# Allegro board RCL_Meter.brd
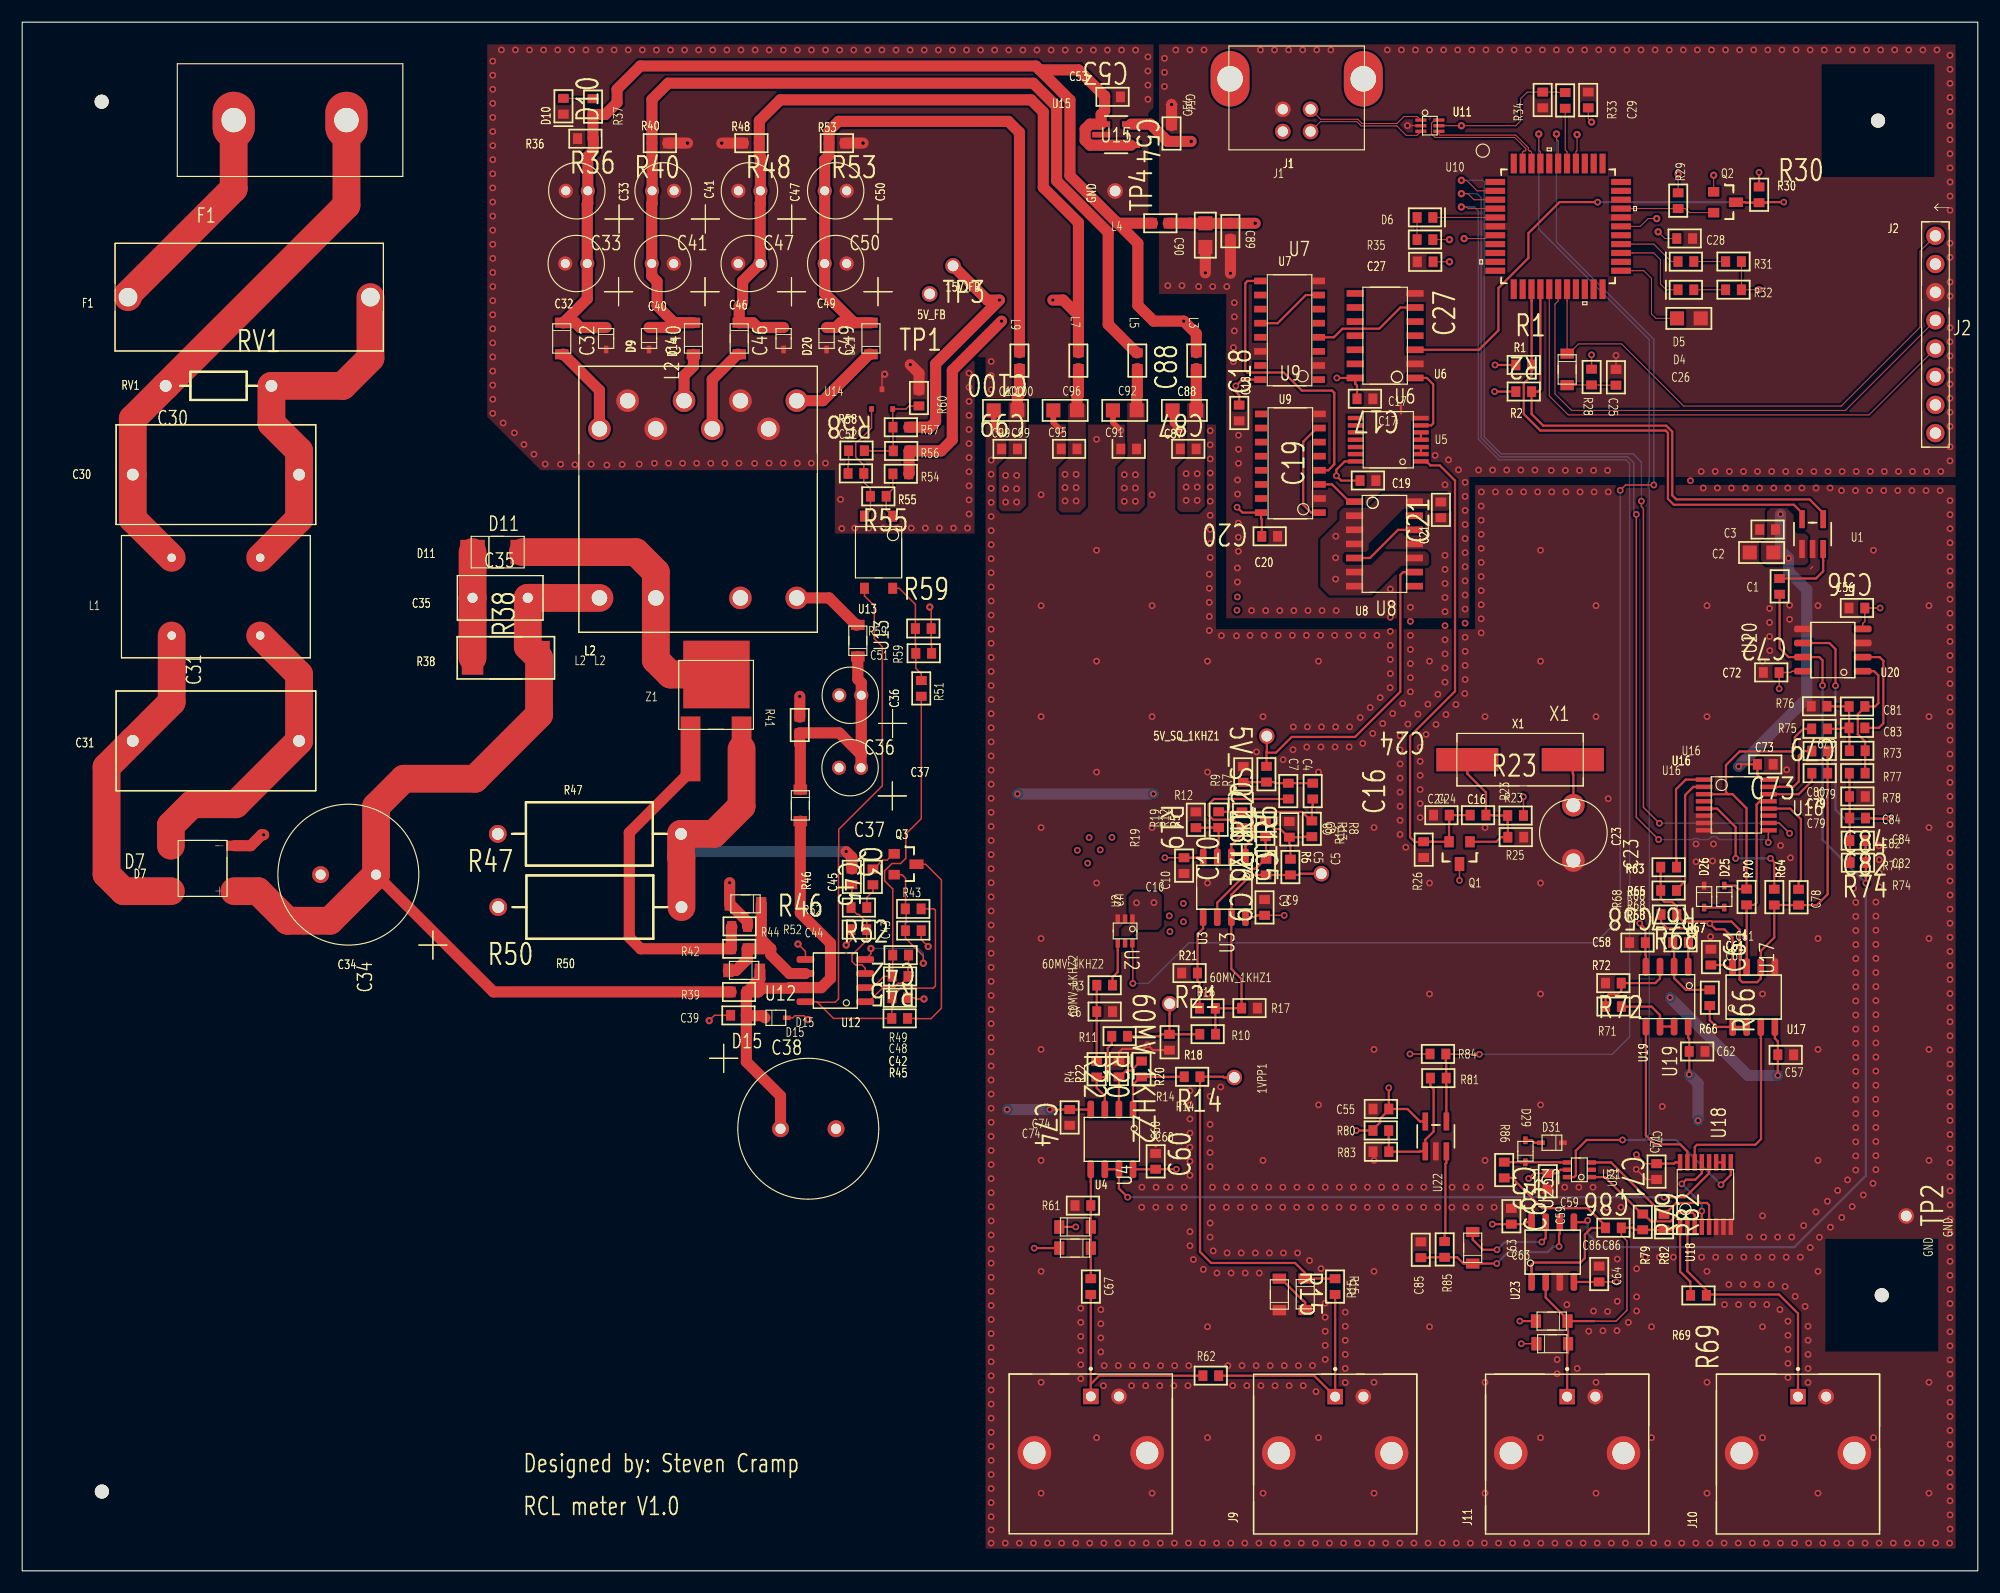
[diagram p0: board, top side]
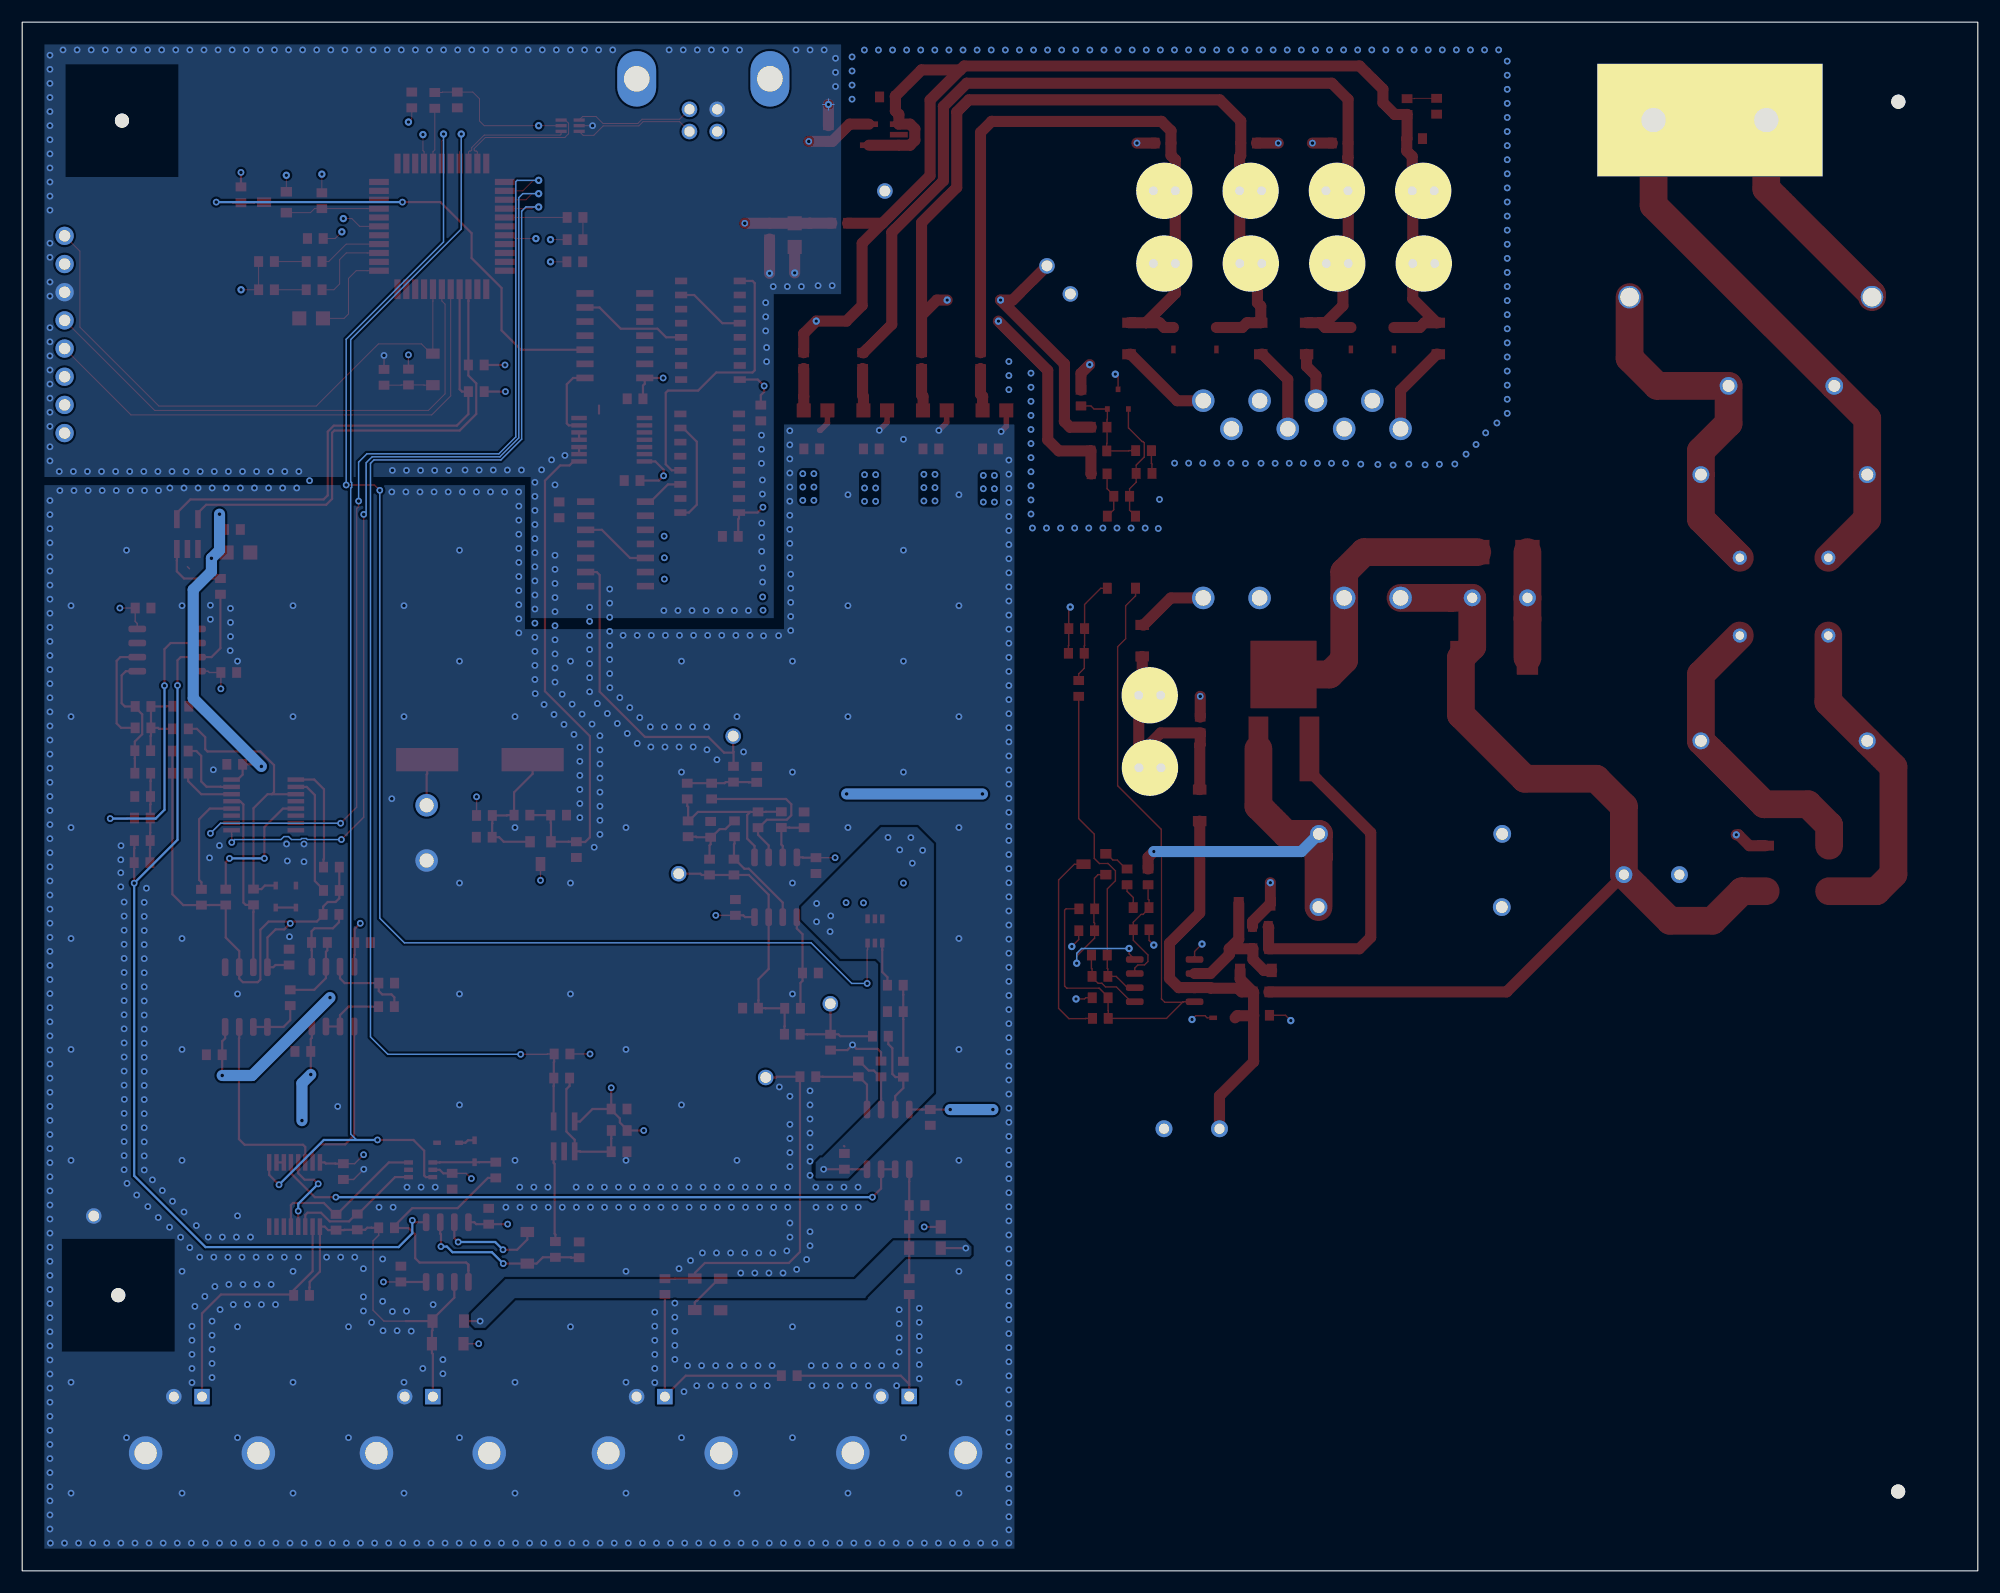
[diagram p1: board, bottom side, seen from below]

Outline 176.2 x 139.6 mm; copper layers: TOP, GND PLANE, POWER PLANE, BOTTOM. Coordinates in mm from the lower left corner of the outline.
Outline path: rectangle 0,0 176.2,139.6

## Design rules (mm)
constraint set DEFAULT: min track width 0.09
net group DP1: nets D+ D-
net group DP2: nets D+ CONN D- CONN
nets with their own width: min track width 0.127; nets N644548
nets with their own width: min track width 1; nets N643724 N643794 N644128 N644562 N644632 N645758 N645784 N658729

## Placement (name value [footprint] x y rotation side)
C1  470n  [SMC0603]  158.34 88.03 90 top
C2  10u  [SMC0805]  155.65 91.79 0 top
C3  0.1u  [SMC0603]  156.55 93.87 0 top
C4  1.5n  [SMC0603]  116.28 71 270 top
C5  1.5n  [SMC0603]  114.27 64.15 270 top
C6  0.1u  [SMC0603]  98.24 50.41 180 top
C7  1.5n  [SMC0603]  114.08 71 270 top
C8  1.5n  [SMC0603]  112.02 67.6 270 top
C9  0.1u  [SMC0603]  111.94 60.51 270 top
C10  0.1u  [SMC0603]  104.68 62.86 90 top
C16  100p  [SMC0603]  130.46 68.12 0 top
C17  0.1u  [SMC0603]  121.69 105.65 180 top
C18  0.1u  [SMC0603]  109.65 103.66 90 top
C19  0.1u  [SMC0603]  121.96 98.28 180 top
C20  0.1u  [SMC0603]  113.11 93.25 180 top
C21  0.1u  [SMC0603]  127.82 94.93 90 top
C23  GKG30015  [GKGXXX15]  139.76 66.52 90 top
C24  100p  [SMC0603]  127.16 68.12 0 top
C25  0.1u  [SMC0603]  143.6 108.3 270 top
C26  10u  [SMC0805]  149.1 112.9 0 top
C27  0.1u  [SMC0603]  125.7 118 0 top
C28  0.1u  [SMC0603]  150.5 120.1 180 top
C29  0.1u  [SMC0603]  141.1 133.3 270 top
C30  0.47u  [B32922C3]  17.45 98.81 0 top
C31  0.47u  [B32922C3]  17.45 74.81 0 top
C32  47u  [CAPBULK_CIR5_PITCH2]  49.92 117.84 180 top
C33  47u  [CAPBULK_CIR5_PITCH2]  49.97 124.4 180 top
C34  100u  [CAPBULK_CIR125_PITCH5]  29.39 62.75 180 top
C35  1u  [LEADED_MLCC_UB1]  43.06 87.71 0 top
C36  1u  [CAPBULK_CIR5_PITCH2]  74.61 78.93 180 top
C37  1u  [CAPBULK_CIR5_PITCH2]  74.59 72.4 180 top
C38  100u  [CAPBULK_CIR125_PITCH5]  70.83 39.85 0 top
C39  0.1u  [SMC0603]  63.83 50.07 0 top
C40  47u  [CAPBULK_CIR5_PITCH2]  57.71 117.84 180 top
C41  47u  [CAPBULK_CIR5_PITCH2]  57.74 124.4 180 top
C42  0.1u  [SMC0603]  79.79 51.66 180 top
C43  10n  [SMC0603]  81 57.71 180 top
C44  68p  [SMC0603]  76.09 57.79 180 top
C45  100p  [SMC0603]  76.65 63.26 270 top
C46  33u  [CAPBULK_CIR5_PITCH2]  65.5 117.84 180 top
C47  33u  [CAPBULK_CIR5_PITCH2]  65.52 124.4 180 top
C48  10n  [SMC0603]  78.39 53.59 0 top
C49  33u  [CAPBULK_CIR5_PITCH2]  73.3 117.84 180 top
C50  33u  [CAPBULK_CIR5_PITCH2]  73.3 124.4 180 top
C51  1.5n  [SMC0603]  81.94 82.71 180 top
C52  10n  [SMC0603]  75.83 98.92 180 top
C53  1u  [SMC0603]  98.95 132.87 180 top
C54  2.2u  [SMC0603]  103.56 130.28 270 top
C55  0.1u  [SMC0603]  123.13 41.63 180 top
C56  0.1u  [SMC0603]  166.02 86.79 180 top
C57  0.1u  [SMC0603]  158.18 46.52 0 top
C58  0.1u  [SMC0603]  146.25 56.63 180 top
C59  0.1u  [SMC0603]  137.46 35.83 270 top
C60  0.1u  [SMC0603]  102.12 36.2 90 top
C61  0.1u  [SMC0603]  152.15 54.61 90 top
C62  0.1u  [SMC0603]  150.2 46.82 0 top
C63  0.1u  [SMC0603]  134.17 31.25 90 top
C64  0.1u  [SMC0603]  142.08 26.04 90 top
C67  1u  [SMC0603]  96.28 24.91 90 top
C71  0.1u  [SMC0603]  147.26 36.7 270 top
C72  0.1u  [SMC0603]  158.3 80.98 180 top
C73  0.1u  [SMC0603]  156.34 72.7 0 top
C74  0.1u  [SMC0603]  94.38 41.58 270 top
C78  2.4n  [SMC0603]  160.05 60.01 90 top
C79  240p  [SMC0603]  162.67 71.9 180 top
C80  24p  [SMC0603]  162.67 73.9 180 top
C81  10n  [SMC0603]  164.6 77.92 0 top
C82  10n  [SMC0603]  164.67 65.83 0 top
C83  10n  [SMC0603]  164.6 75.99 0 top
C84  10n  [SMC0603]  164.66 67.86 0 top
C85  1u  [SMC0603]  126.02 29.65 270 top
C86  50p  [SMC0603]  144.08 30.92 180 top
C87  0.1u  [SMC0603]  105.77 101.13 180 top
C88  10u  [SMC0805]  105.78 104.61 180 top
C89  0.1u  [SMC0603]  108.86 121.47 270 top
C90  10u  [SMC0805]  106.6 121.47 270 top
C91  0.1u  [SMC0603]  100.4 101.13 180 top
C92  10u  [SMC0805]  100.41 104.61 180 top
C95  0.1u  [SMC0603]  95.04 101.13 180 top
C96  10u  [SMC0805]  95.04 104.61 180 top
C99  0.1u  [SMC0603]  89.67 101.13 180 top
C100  10u  [SMC0805]  89.66 104.61 180 top
D1  MMSZ4679-TP  [SOD_123]  115.6 24.93 90 top
D2  MMSZ4679-TP  [SOD_123]  113.27 24.91 270 top
D3  PMEG3010EH,115  [SOD_123]  139.2 108.3 90 top
D4  RED  [DSMC0603]  149.19 115.48 0 top
D5  RED  [DSMC0603]  149.19 118.02 0 top
D6  RED  [DSMC0603]  127.1 122 180 top
D7  ABF26TR  [SOPA-4]  16.26 63.31 180 top
D8  PMEG3010EH,115  [SOD_123]  48.61 111.09 90 top
D9  DDZ5V1BSF-7  [SOD323]  52.61 111.09 90 top
D10  RED  [DSMC0603]  48.76 131.31 90 top
D11  S1MTR  [SMA]  42.84 91.83 0 top
D12  PMEG3010EH,115  [SOD_123]  75.29 83.84 270 top
D13  PMEG3010EH,115  [SOD_123]  70.11 69 90 top
D14  DDZ5V1BSF-7  [SOD323]  56.48 111.09 270 top
D15  DDZ20BSF-7  [SOD323]  67.91 49.85 180 top
D16  PMEG3010EH,115  [SOD_123]  65.05 54.12 0 top
D17  PMEG3010EH,115  [SOD_123]  60.48 111.09 270 top
D18  PMEG3010EH,115  [SOD_123]  65.17 60.12 0 top
D19  PMEG3010EH,115  [SOD_123]  64.6 111.09 90 top
D20  DDZ16ASF-7  [SOD323]  68.6 111.09 90 top
D21  DDZ16ASF-7  [SOD323]  72.47 111.09 270 top
D22  PMEG3010EH,115  [SOD_123]  76.47 111.09 270 top
D23  PMEG3010EH,115  [SOD_123]  94.86 31 180 top
D24  PMEG3010EH,115  [SOD_123]  94.86 29.09 0 top
D25  DDZ5V1BSF-7  [SOD323]  153.36 60.78 90 top
D26  DDZ5V1BSF-7  [SOD323]  151.54 60.78 90 top
D27  PMEG3010EH,115  [SOD_123]  137.86 20.47 180 top
D28  PMEG3010EH,115  [SOD_123]  130.69 29.12 270 top
D29  DDZ5V1BSF-7  [SOD323]  135.44 37.82 270 top
D30  PMEG3010EH,115  [SOD_123]  137.81 22.51 0 top
D31  DDZ5V1BSF-7  [SOD323]  137.83 38.59 0 top
F1  4527  [4527_FUSE_HOLDER]  20.45 114.81 0 top
J2  CON8  [HEADER8_PIN]  172.38 111.45 0 top
J8  1-1337543-0  [CONN_1-1337543-0]  96.28 15.72 90 top
J9  1-1337543-0  [CONN_1-1337543-0]  118.3 15.7 90 top
J10  1-1337543-0  [CONN_1-1337543-0]  160 15.7 90 top
J11  1-1337543-0  [CONN_1-1337543-0]  139.2 15.7 90 top
J12  CON2  [MAINS]  24.14 130.78 180 top
J13  CON6  [USB_B]  114.83 130.69 180 top
L1  TLF9UA102W0R8K1  [TLF9UA]  17.45 87.81 270 top
L2  Custome transformer _0  [B66206]  60.9 96.59 90 top
L3  ILBB-0603  [SMC0603]  105.79 109.81 270 top
L4  ILBB-0603  [SMC0603]  101.83 121.48 0 top
L5  ILBB-0603  [SMC0603]  100.48 109.81 270 top
L7  ILBB-0603  [SMC0603]  95.17 109.81 270 top
L9  ILBB-0603  [SMC0603]  89.86 109.81 270 top
NOREF  -  [unnamed]  167.21 130.73 0 top
NOREF#2  -  [unnamed]  167.55 24.84 0 top
NOREF#3  -  [unnamed]  7.18 7.15 0 top
NOREF#4  -  [unnamed]  7.16 132.43 0 top
Q1  MMBT3904  [SMSOT23123]  128.56 65.72 180 top
Q2  BSS138  [SMSOT23123]  152.4 122.43 270 top
Q3  MMBT3904  [SMSOT23123]  78.57 62.75 270 top
R1  2k  [SMC0603]  136 108.7 180 top
R2  2k  [SMC0603]  136 106.3 180 top
R3  1k  [SMC0603]  96.82 52.79 0 top
R4  1k  [SMC0603]  96.81 45.93 270 top
R5  1M  [SMC0603]  109.9 66.99 90 top
R6  1M  [SMC0603]  112.07 64.15 270 top
R7  2M  [SMC0603]  112.11 72.52 270 top
R8  2M  [SMC0603]  116.2 67.6 270 top
R9  10k  [SMC0603]  110.02 72.5 270 top
R10  1k  [SMC0603]  107.52 48.37 180 top
R11  51R  [SMC0603]  99.59 48.19 180 top
R12  100k  [SMC0603]  107.8 67 90 top
R13  10k  [SMC0603]  114.17 67.55 270 top
R14  100R  [SMC0603]  104.7 44.54 0 top
R15  330R  [SMC0603]  118.29 26.33 270 top
R16  1M  [SMC0603]  106.08 50.71 0 top
R17  51R  [SMC0603]  111.29 50.72 180 top
R18  51R  [SMC0603]  103.37 46.94 90 top
R19  1.5k  [SMC0603]  105.75 68.41 270 top
R20  82k  [SMC0603]  100.86 45.95 270 top
R21  1.5k  [SMC0603]  104.47 53.89 0 top
R22  10k  [SMC0603]  98.82 45.95 270 top
R23  100k  [SMC0603]  133.84 68.09 0 top
R25  24k  [SMC0603]  135.28 66.13 180 top
R26  2k  [SMC0603]  126.27 64.3 90 top
R28  10k  [SMC0603]  141.4 106.9 90 top
R29  10k  [SMC0603]  149.2 122.8 90 top
R30  10k  [SMC0603]  156.49 123.33 90 top
R31  330R  [SMC0603]  154.9 118.02 180 top
R32  330R  [SMC0603]  154.9 115.48 180 top
R33  100k  [SMC0603]  139.02 133.26 270 top
R34  100k  [SMC0603]  137 133.3 270 top
R35  330R  [SMC0603]  127.1 120 180 top
R36  NP  [SMC0603]  50.04 129.1 0 top
R37  330R  [SMC0603]  51.42 131.28 90 top
R38  680k  [SMR2512]  46.57 82.3 180 top
R39  100k  [SMC0603]  63.88 52.19 0 top
R40  NP  [SMC0603]  56.74 128.7 0 top
R41  1k  [SMC0603]  70.06 76.96 270 top
R42  100R  [SMC0603]  63.89 56.07 0 top
R43  1k  [SMC0603]  79.57 59.68 0 top
R44  100k  [SMC0603]  65.35 58.09 180 top
R45  10k  [SMC0603]  79.77 49.79 180 top
R46  24k  [SMC0603]  74.76 63.27 270 top
R47  3R  [AX650X225037]  42.85 66.43 0 top
R48  NP  [SMC0603]  64.99 128.7 0 top
R49  10k  [SMC0603]  78.44 55.5 0 top
R50  3R  [AX650X225037]  42.89 59.83 0 top
R51  10k  [SMC0603]  81.01 80.25 270 top
R52  49.9k  [SMC0603]  74.67 59.79 0 top
R53  NP  [SMC0603]  72.7 128.7 0 top
R54  51R  [SMC0603]  79.88 98.88 180 top
R55  1.2k  [SMC0603]  76.42 96.87 0 top
R56  5.1k  [SMC0603]  78.48 100.96 0 top
R57  24k  [SMC0603]  78.46 103.09 0 top
R58  82k  [SMC0603]  75.88 100.98 180 top
R59  150R  [SMC0603]  81.9 84.94 180 top
R60  2.7k  [SMC0603]  80.8 106.43 270 top
R61  10M  [SMC0603]  94.86 32.93 0 top
R62  100R  [SMC0603]  107.8 17.59 180 top
R63  100R  [SMC0603]  147.63 63.43 0 top
R64  1k  [SMC0603]  157.86 60.02 90 top
R65  10k  [SMC0603]  147.63 61.33 0 top
R66  10k  [SMC0603]  152.05 50.95 90 top
R67  10k  [SMC0603]  150.13 56.64 180 top
R68  1k  [SMC0603]  147.66 59.17 0 top
R69  1k  [SMC0603]  150.32 24.83 0 top
R70  100R  [SMC0603]  155.36 60.03 90 top
R71  10k  [SMC0603]  144.09 50.86 180 top
R72  10k  [SMC0603]  142.65 52.98 0 top
R73  2.7M  [SMC0603]  164.63 73.93 0 top
R74  2.7M  [SMC0603]  164.69 63.84 0 top
R75  1.2M  [SMC0603]  161.23 75.9 0 top
R76  100R  [SMC0603]  161.19 77.94 0 top
R77  750k  [SMC0603]  166.05 71.9 180 top
R78  100R  [SMC0603]  166.06 69.8 180 top
R79  3.3k  [SMC0603]  146.01 30.74 90 top
R80  10k  [SMC0603]  123.12 39.69 180 top
R81  240k  [SMC0603]  126.88 44.42 0 top
R82  330R  [SMC0603]  147.92 30.71 90 top
R83  10k  [SMC0603]  121.71 37.78 0 top
R84  10k  [SMC0603]  128.27 46.59 180 top
R85  10k  [SMC0603]  128.16 28.26 90 top
R86  330R  [SMC0603]  133.53 36.84 270 top
RV1  MOV-07D201K  [AX375X100034]  22.45 106.81 180 top
TP1  5V  [TP]  81.76 115.1 0 top
TP2  -5V  [TP]  169.75 31.99 90 top
TP3  15V  [TP]  83.87 117.63 0 top
TP4  -15V  [TP]  98.47 124.38 90 top
U1  MCP3221A5T-EOT  [SOT-23-5_MC_MCH-M]  161.31 93.46 90 top
U2  74LVC1G3157  [SC70_2]  99.37 57.68 270 top
U3  LM2904/NS  [8-SOIC]  108.31 61.62 270 top
U4  LM2904/NS  [8-SOIC]  98.18 38.89 270 top
U5  74HC05  [14TSSOP]  123.08 101.96 180 top
U6  74HC393  [14-SOIC]  122.8 111.34 180 top
U7  74HC390  [16-SOIC]  114.19 111.83 180 top
U8  74HC73  [14-SOIC]  122.74 92.57 0 top
U9  74HC390  [16-SOIC]  114.26 99.84 180 top
U10  pic18f46j53-ipt  [TQFP44_10X10MC_MCH-M]  138.39 121.19 0 top
U11  USBLC6-2P6  [SOT666]  126.83 130.27 0 top
U12  UC3843  [8-SOIC]  73.27 53.21 180 top
U13  FODM124  [4-SMD_GULLWING]  77.16 91.82 270 top
U14  TL431IDBZR  [SOT23]  77.46 105.62 90 top
U15  adp1714aujz33r7  [SOT-23-5_MC_MCH-M]  98.56 129.46 0 top
U16  74HC4052  [16TSSOP]  154.44 69.04 0 top
U17  LM2904/NS  [8-SOIC]  156.01 51.72 90 top
U18  74HC4053  [16TSSOP]  151.66 33.92 90 top
U19  LM2904/NS  [8-SOIC]  148.2 51.76 270 top
U20  LM2904/NS  [8-SOIC]  163.14 83 180 top
U21  74LVC1G3157  [SC70_2]  140.3 36.15 180 top
U22  lmv331/NS  [SOT-23-5_MC_MCH-M]  127.37 39.16 90 top
U23  LM2904/NS  [8-SOIC]  137.9 28.73 90 top
UNK1VPP1  TEST POINT_1  [TP]  109.21 44.47 0 top
UNK5V_SQ_1KHZ1  TEST POINT_1  [TP]  112.14 75.24 270 top
UNK60MV_1KHZ1  TEST POINT_1  [TP]  117.05 62.84 270 top
UNK60MV_1KHZ2  TEST POINT_1  [TP]  103.39 51.12 270 top
X1  ABLS-16.000MHZ-20-B-3-H-T  [ABLS]  134.96 73.12 180 top
Z1  FGD5T120SH  [TO252AA]  60.22 74.12 0 top

## Library data of the parts
C1-C10 C16-C21 C24-C31 C35 C39 C42-C45 C48 C51-C64 C67 C71-C74 C78-C86 = C
C23 = C_var
C32-C34 C36-C38 C40 C41 C46 C47 C49 C50 = CAP
C87-C92 C95 C96 C99 C100 = CAP NP
D1 D2 = mmsz5221bt1_0
D3 = BAS16_0
D4-D6 D10 = LED
D7 = BRIDGE_2
D8 D12 D16-D19 D22 = 6CWQ10FN_1
D9 D14 D15 D20 D21 D25 D26 D29 D31 = DDZ4V7ASF-7
D11 D13 = 1N1183
D23 D24 D27 D28 D30 = 1N4148_0
F1 = FUSE/SM
J2 = CON8
J8-J11 = 1-1337543-0
J12 = CON2_0
J13 = CON6_0
L1 = B82793C0475N265_0
L2 = Custome transformer _0
L3-L5 L7 L9 = BEAD
Q1 = MMBT3904
Q2 = BSS138
Q3 = 2N3904
R1-R23 R25 R26 R28-R36 R38-R86 = R
R37 = RES_0
RV1 = VARISTOR
TP1-TP4 = T POINT R
U1 = MCP3221A5T-EOT
U2 U21 = 74LVC1G3157
U3 U4 U17 U19 U20 U23 = LM2904/NS
U5 = 74HC05
U6 = 74HC393
U7 U9 = 74HC390
U8 = 74HC73
U10 = pic18f46j53-ipt
U11 = USBLC6-2P6
U12 = UC3843
U13 = 3N243
U14 = TL431_0
U15 = adp1714aujz33r7
U16 = 74HC4052
U18 = 74HC4053_0
U22 = lmv331/NS
UNK1VPP1 UNK5V_SQ_1KHZ1 UNK60MV_1KHZ1 UNK60MV_1KHZ2 = TEST POINT_1
X1 = QZS10MEG
Z1 = ZbreakN

## Footprints (pads in the part's own frame, mm; a bottom-side part is the same pattern mirrored in y, then rotated)
4-SMD_GULLWING
  rect 1x0.8 smd: 1(-3.251,1.27) 2(-3.251,-1.27) 3(3.251,-1.27) 4(3.251,1.27)
8-SOIC
  rrect 1.6x0.6 smd: 1(-2.692,1.905) 2(-2.692,0.635) 3(-2.692,-0.635) 4(-2.692,-1.905) 5(2.692,-1.905) 6(2.692,-0.635) 7(2.692,0.635) 8(2.692,1.905)
14-SOIC
  rect 1.55x0.6 smd: 1(-2.692,3.81) 2(-2.692,2.54) 3(-2.692,1.27) 4(-2.692,0) 5(-2.692,-1.27) 6(-2.692,-2.54) 7(-2.692,-3.81) 8(2.692,-3.81) 9(2.692,-2.54) 10(2.692,-1.27) 11(2.692,0) 12(2.692,1.27) 13(2.692,2.54) 14(2.692,3.81)
14TSSOP
  rect 1.4x0.4 smd: 1(-2.946,1.956) 2(-2.946,1.295) 3(-2.946,0.66) 4(-2.946,0) 5(-2.946,-0.66) 6(-2.946,-1.295) 7(-2.946,-1.956) 8(2.946,-1.956) 9(2.946,-1.295) 10(2.946,-0.66) 11(2.946,0) 12(2.946,0.66) 13(2.946,1.295) 14(2.946,1.956)
16-SOIC
  rect 1.1x0.6 smd: 1(-2.642,4.445) 2(-2.642,3.175) 3(-2.642,1.905) 4(-2.642,0.635) 5(-2.642,-0.635) 6(-2.642,-1.905) 7(-2.642,-3.175) 8(-2.642,-4.445) 9(2.642,-4.445) 10(2.642,-3.175) 11(2.642,-1.905) 12(2.642,-0.635) 13(2.642,0.635) 14(2.642,1.905) 15(2.642,3.175) 16(2.642,4.445)
16TSSOP
  rect 1.5x0.4 smd: 1(-2.896,2.286) 2(-2.896,1.626) 3(-2.896,0.965) 4(-2.896,0.33) 5(-2.896,-0.33) 6(-2.896,-0.965) 7(-2.896,-1.626) 8(-2.896,-2.286) 9(2.896,-2.286) 10(2.896,-1.626) 11(2.896,-0.965) 12(2.896,-0.33) 13(2.896,0.33) 14(2.896,0.965) 15(2.896,1.626) 16(2.896,2.286)
4527_FUSE_HOLDER
  round 2.032 hole 1.676: 1(-10.922,0) 2(10.922,0)
ABLS
  rect 5.6x2.1 smd: 1(-4.75,0) 2(4.75,0)
AX375X100034
  round 1.6 hole 1.067: 1(0,0) 2(9.525,0)
AX650X225037
  round 1.6 hole 1.067: 1(0,0) 2(16.51,0)
B32922C3
  round 1.524 hole 1.067: 1(-7.493,0) 2(7.493,0)
B66206
  round 2.032 hole 1.397: 1(-8.89,8.89) 2(-8.89,3.81) 3(-8.89,-3.81) 4(-8.89,-8.89) 5(6.35,8.89) 6(8.89,6.35) 7(6.35,3.81) 8(8.89,1.27) 9(6.35,-1.27) 10(8.89,-3.81) 11(6.35,-6.35) 12(8.89,-8.89)
CAPBULK_CIR5_PITCH2
  round 1.27 hole 0.813: 1(-0.991,0) 2(0.991,0)
CAPBULK_CIR125_PITCH5
  round 1.524 hole 0.914: 1(-2.5,0) 2(2.5,0)
CONN_1-1337543-0
  rect 1.398x1.398 hole 0.89: 1(0,0)
  round 1.398 hole 0.89: 2(0,-2.54)
  round 3.015 hole 2.01: P1(-5.08,-5.08) P2(-5.08,5.08)
DSMC0603
  rect 0.813x0.965 smd: 1(0,0) 2(1.422,0)
GKGXXX15
  round 2.032 hole 1.27: 1(-2.489,0) 2(2.489,0)
HEADER8_PIN
  round 1.651 hole 1.02: 1(0,8.89) 2(0,6.35) 3(0,3.81) 4(0,1.27) 5(0,-1.27) 6(0,-3.81) 7(0,-6.35) 8(0,-8.89)
LEADED_MLCC_UB1
  round 1.524 hole 0.914: 1(-2.489,0) 2(2.489,0)
MAINS
  oval 3.8x5.1 hole 2.2: 1(-5.08,0) 2(5.08,0)
SC70_2
  rect 0.8x0.4 smd: 1(-1.092,0.66) 2(-1.092,0) 3(-1.092,-0.66) 4(1.092,-0.66) 5(1.092,0) 6(1.092,0.66)
SMA
  rect 2.21x2.21 smd: 1(-2.261,0) 2(2.261,0)
SMC0603
  rect 0.813x0.965 smd: 1(0,0) 2(1.422,0)
SMC0805
  rect 1.27x1.27 smd: 1(0,0) 2(2.134,0)
SMR2512
  rect 1.93x3.048 smd: 1(0,0) 2(5.994,0)
SMSOT23123
  rect 0.864x1.016 smd: 1(-1.88,0) 2(0,0)
  rect 0.864x1.27 smd: 3(-0.94,2.007)
SOD323
  rect 0.7x0.4 smd: 1(-0.991,0) 2(0.991,0)
SOD_123
  rect 0.914x1.219 smd: 1(-1.422,0) 2(1.422,0)
SOPA-4
  rect 1.5x0.9 smd: 1(-2.86,2.05) 2(-2.86,-2.05) 3(2.86,-2.05) 4(2.86,2.05)
SOT23
  rect 0.508x0.432 smd: 1(-0.889,0.94) 2(-0.889,-0.965) 3(0.889,0)
SOT666
  rect 1x0.3 smd: 1(-0.813,0.508) 2(-0.813,0) 3(-0.813,-0.508) 4(0.813,-0.508) 5(0.813,0) 6(0.813,0.508)
SOT-23-5_MC_MCH-M
  rect 1.626x0.508 smd: 1(-1.346,0.95) 2(-1.346,0) 3(-1.346,-0.95) 4(1.346,-0.95) 5(1.346,0.95)
TLF9UA
  round 1.27 hole 0.762: 1(-3.505,3.988) 2(-3.505,-3.988) 3(3.505,-3.988) 4(3.505,3.988)
TO252AA
  rect 1.778x5.842 smd: 1(-0.004,-0.034) 3(4.596,-0.034)
  rect 5.969x6.096 smd: 2(2.332,6.673)
TP
  round 1.397 hole 0.965: 1(0,0)
TQFP44_10X10MC_MCH-M
  rect 1.778x0.559 smd: 1(-5.664,4) 2(-5.664,3.2) 3(-5.664,2.4) 4(-5.664,1.6) 5(-5.664,0.8) 6(-5.664,0) 7(-5.664,-0.8) 8(-5.664,-1.6) 9(-5.664,-2.4) 10(-5.664,-3.2) 11(-5.664,-4) 23(5.664,-4) 24(5.664,-3.2) 25(5.664,-2.4) 26(5.664,-1.6) 27(5.664,-0.8) 28(5.664,0) 29(5.664,0.8) 30(5.664,1.6) 31(5.664,2.4) 32(5.664,3.2) 33(5.664,4)
  rect 0.559x1.778 smd: 12(-4,-5.664) 13(-3.2,-5.664) 14(-2.4,-5.664) 15(-1.6,-5.664) 16(-0.8,-5.664) 17(0,-5.664) 18(0.8,-5.664) 19(1.6,-5.664) 20(2.4,-5.664) 21(3.2,-5.664) 22(4,-5.664) 34(4,5.664) 35(3.2,5.664) 36(2.4,5.664) 37(1.6,5.664) 38(0.8,5.664) 39(0,5.664) 40(-0.8,5.664) 41(-1.6,5.664) 42(-2.4,5.664) 43(-3.2,5.664) 44(-4,5.664)
unnamed
  round 1.27 hole 6.35 unplated: (0,0)
USB_B
  round 1.4 hole 0.92: 1(1.25,0.95) 2(-1.25,0.95) 3(-1.25,-1.05) 4(1.25,-1.05)
  oval 3.5x5 hole 2.3: 5(6,-3.8) 6(-6,-3.8)

## Nets
3V3: C27.2 C28.2 C29.2 C54.2 J2.2 Q2.1 R28.2 R29.2 R31.1 R32.1 R35.1 U10.7 U10.28 U10.37(VUSB) U15.5
5V_A: C2.2 C3.2 C55.1 C59.1 C71.1 C73.1 C87.1 C88.1 D23.2(CAT) D27.2(CAT) L3.2 R80.2 R84.2 U1.1 U2.1(Z1) U2.5 U16.16 U18.16 U21.5 U22.5
5V_D: C17.2 C18.2 C19.2 C20.2 C21.2 C89.1 C90.1 L4.2 R1.2 R2.2 R30.2 U5.14 U6.14 U7.16 U8.2 U8.3 U8.4 U8.6 U8.7 U8.10 U8.14 U9.16
15V_A: C9.2 C60.1 C61.1 C62.1 C63.1 C72.1 C95.1 C96.1 L7.2 Q1.3 R23.2 U3.8 U4.8 U17.8 U19.8 U20.8 U23.8
-5V: C40.2 C41.2 D14.1 D17.1 L5.1 R40.1
-5V_A: C91.1 C92.1 D24.1 D30.1 L5.2
-15V: C49.2 C50.2 D21.1 D22.1 L9.1 R53.1
-15V_A: C10.2 C56.1 C57.1 C58.1 C64.1 C74.1 C99.1 C100.1 L9.2 U3.4 U4.4 U17.4 U19.4 U20.4 U23.4
GND_SIGNAL: C34.2 C36.2 C37.2 C38.2 C39.1 C42.1 C43.1 C44.2 C51.1 D7.2 D15.1 D18.1 L2.3 R41.1 R44.1 R47.1 R50.1 R59.1 U12.5
0: C2.1 C3.1 C6.1 C9.1 C10.1 C17.1 C18.1 C19.1 C20.1 C21.1 C23.1 C24.1 C25.1 C26.2 C27.1 C28.1 C29.1 C32.2 C33.2 C40.1 C41.1 C46.2 C47.2 C49.1 C50.1 C53.1 C54.1 C55.2 C56.2 C57.2 C58.2 C59.2 C60.2 C61.2 C62.2 C63.2 C64.2 C71.2 C72.2 C73.2 C74.2 C85.1 C87.2 C88.2 C89.2 C90.2 C91.2 C92.2 C95.2 C96.2 C99.2 C100.2 D2.2(CAT) D9.1 D10.1(CATHODE) D14.2(C) D20.1 D21.2(C) D26.2(C) D31.2(C) J2.3 J8.2 J8.P1 J8.P2(SHIELD__1) J9.2 J9.P1 J9.P2(SHIELD__1) J10.2 J10.P1 J10.P2(SHIELD__1) J11.2 J11.P1 J11.P2(SHIELD__1) J13.4 L2.6 L2.7 L2.10 L2.11 R9.1 R13.1 R17.1 R18.1 R19.1 R21.1 R22.1 R25.1 R26.1 R34.2 R36.1 R40.2 R48.1 R53.2 R60.1 R61.1 R72.1 R76.1 R78.1 R83.1 TP2.1(TP) TP4.1(TP) U1.2(VSS) U2.2 U2.3 U5.7 U6.2 U6.7 U7.2 U7.8 U7.14 U8.11 U9.2 U9.8 U10.6 U10.29 U11.2 U14.3 U15.2 U16.4 U16.6 U16.7 U16.8 U16.11 U17.5 U18.6 U18.7(VEE) U18.8 U20.3 U20.5 U21.2 U22.2(V-) U23.3
1KHZ_0PHASE: R7.1 U8.9 UNK5V_SQ_1KHZ1.1
+ DRIVE: J9.1 R15.2 R62.1
+ SENSE: C67.1 J8.1 R62.2
- DRIVE: C86.1 D27.1 D30.2(CAT) J11.1 R69.1 R79.1 R82.1 U18.1 U23.2
- SENSE: J10.1 R69.2 U18.2
A_PGA_CONTROL: U10.2 U16.10
B_PGA_CONTROL: U10.3 U16.9
BANDPASS2_OUT: C1.1 C82.2 R74.2 U20.7(OUT) U23.5
CLK_1MHZ: U6.6 U7.4
CLK_8MHZ: Q2.3 R30.1 U6.3
CLK_16MHZ_D: U5.4 U5.5
CURRENT_GAIN: U10.41 U18.9 U21.6
D+: U10.43 U11.6
D+ CONN: J13.3 U11.1
D-: U10.42 U11.4
D- CONN: J13.2 U11.3
DC_EN: U2.6 U10.39
FB: C51.2 R51.1 R59.2 U13.4
FB_5V: C32.1 C33.1 C53.2 D8.2(C) D9.2(C) L3.1 L4.1 R36.2 R37.1 R54.1 R56.2 TP1.1(TP) U15.1 U15.3 U15.4(TRK)
FB_15V: C46.1 C47.1 D19.2(C) D20.2(C) L7.1 R48.2 R57.2 TP3.1(TP)
MCLR: D3.2(CAT) J2.1 U10.18
OVER_RANGE: R81.2 R84.1 U10.4 U22.4
PCLK: J2.5 U10.16
PDATA: J2.4 U10.17
PGA_IN: R67.1 R68.1 U19.1
PGA_OUT: D25.2(C) R70.2 R75.1 U16.3(Y-COM)
SCL: R1.1 U1.5 U10.14
SDA: R2.1 U1.4 U10.15
V_SENSE: U4.6 U4.7(OUT) U18.12
VI_SENSE: U10.40
VISENSE: U18.10 U18.11
VSMREF: C42.2 R43.2 R45.2 U12.8(VREF) U13.3
VUSB: J13.1 R33.1 R34.1 U11.5(VBUS)
X1_CURRENT: R82.2 U18.5 U21.3
X10_CURRENT: R79.2 U18.3 U21.1(Z1)
N14331: C16.1 C24.2 Q1.2(E) R26.2 U5.1
N14429: C16.2 Q1.1 R23.1 R25.2 X1.2
N22334: C23.2 X1.1
N23188: U5.6 U6.1
N23822: U7.7 U7.12
N23826: U7.9(QD) U9.4
N23830: U9.1 U9.7
N23855: U8.1 U9.3
N24205: U8.5 U8.12
N27046: U5.2 U5.3
N45619: C4.1 C7.1 R7.2 R9.2
N45631: C4.2 R5.2 R8.1 R12.2 U3.1
N45655: C5.1 C8.1 R8.2 R13.2
N45667: C5.2 R6.2 R10.1 R16.2 R17.2 U3.7(OUT) UNK60MV_1KHZ1.1
N45695: C7.2 R5.1 U3.2
N45743: C8.2 R6.1 U3.6
N46065: R12.1 R19.2 U3.3
N46201: R16.1 R21.2 U3.5
N47774: R10.2 R11.1 R18.2 UNK60MV_1KHZ2.1
N48454: R14.1 R20.2 U4.1
N48461: R20.1 R22.2 U4.2
N48573: R4.2 R11.2 U4.3
N52759: D1.2(CAT) R14.2 R15.1 UNK1VPP1.1
N52823: D1.1 D2.1
N76767: R3.2 U2.4
N78850: C67.2 D23.1 D24.2(CAT) R61.2 U4.5
N81946: C86.2 R86.2 U23.1
N84771: D29.2(C) R86.1 U21.4
N87926: U18.4 U18.13
N89196: U18.15 U19.5
N89225: U17.3 U18.14
N91116: R71.1 U19.6 U19.7(OUT)
N91141: R66.1 U17.1 U17.2
N91299: R66.2 R67.2 U19.2
N91314: R71.2 R72.2 U19.3
N98354: C78.1 C79.1 C80.1 R63.1 R64.1 R65.1 R68.2 U17.6
N98362: R63.2 U16.1
N98374: R64.2 U16.5
N98382: R65.2 U16.2
N98434: C78.2 U16.12
N98442: R70.1 U16.13 U17.7(OUT)
N98466: C79.2 U16.14
N98486: C80.2 U16.15
N99940: C82.1 C84.1 R74.1 R77.2 R78.2
N100166: C81.2 R73.2 R77.1 U20.1
N100188: C81.1 C83.1 R73.1 R75.2 R76.2
N100680: C84.2 U20.6
N101420: C83.2 U20.2
N107415: R80.1 R81.1 R83.2 U22.1
N107479: C85.2 D28.2(CAT) R85.1 U23.6
N107705: D28.1 U23.7(OUT)
N107723: R85.2 U22.3
N438926: C25.2 D3.1 R28.1
N454113: Q2.2(S) R29.1 U10.30
N462846: C31.2 D7.3 L1.4(A4)
N462874: C30.2 F1.2 L1.1 RV1.1
N462956: C30.1 J12.1 L1.2 RV1.2
N462968: C31.1 D7.4(AC2) L1.3
N643724: C34.1 C35.2 D7.1 L2.1 R38.1 R39.1
N643794: D8.1 L2.5
N644066: C35.1 D11.1(CAT) R38.2
N644128: C38.1 C39.2 D13.1(CAT) D15.2(C) D16.2(C) R39.2 U12.7
N644280: D11.2 L2.2 Z1.2
N644430: R42.1 R44.2 Z1.1(G)
N644548: R46.1 R47.2 R50.2 Z1.3
N644562: D17.2(C) L2.8
N644632: D19.1 L2.9
N644796: D16.1 D18.2(C) R42.2 U12.6
N645208: C43.2 Q3.2 R43.1 U12.4
N645326: C48.1 R49.1 R51.2 U12.2
N645422: C48.2 R49.2 U12.1
N645436: C44.1 R46.2 R52.1 U12.3
N645758: C36.1 C37.1 D12.2(C) D13.2 R41.2
N645784: D12.1 L2.4
N645912: Q3.3 R45.1
N645944: R54.2 R55.2 U13.1
N646272: C52.1 R55.1 U13.2(K) U14.1
N646286: R56.1 R57.1 R58.1 R60.2 U14.2(REF)
N646346: C45.2 R52.2
N646432: C52.2 R58.2
N658729: D22.2(C) L2.12
N667171: C45.1 Q3.1(E)
N669482: F1.1 J12.2
N699981: C26.1 U10.23
N716319: C1.2 U1.3
N720821: R33.2 U10.38
N725900: D6.1(CATHODE) U10.5
N725912: D4.1(CATHODE) U10.25
N725916: D5.1(CATHODE) U10.26
N725964: D6.2 R35.2
N726041: D4.2 R32.2
N726099: D5.2 R31.2
N736374: D10.2 R37.2
N741558: C6.2 R3.1 R4.1
N862480: D29.1 D31.1
N987280: D25.1 D26.1

Pads without a net: J2 6 7 8; J13 5 6; U5 8 9 10 11 12 13; U6 4 5 8 9 10 11 12 13; U7 1 3 5 6 10 11 13 15; U8 8 13; U9 5 6 9 10 11 12 13 14 15; U10 1 8 9 10 11 12 13 19 20 21 22 24 27 31 32 33 34 35 36 44

## Via types
v1: diameter 0.61, hole 0.33, TOP to BOTTOM, 1098 vias
v2: diameter 0.66, hole 0.305, TOP to BOTTOM, 37 vias

## Routing (per net, layer and track width the routed paths; a pad name or vN(x,y) marks a point on that pad's centre or on a via; arc(x,y) is an arc through that point)
3V3: length 30
  TOP w0.09: v2(156.48,115.48) R32.1 R31.1 ; v2(147.4,120.7) 148,120.1 C28.2 ; C29.2 141.1,130.9 v2(141.4,130.6) ; U10.37 139.99,127.92 140.09,128.02 v2(140.09,129.47) ; 132.73,120.4 132.12,120.4 131.81,120.09 v2(129.91,120.09) ; Q2.1 v2(152.4,125.8) ; v2(147.27,121.9) 146.5,121.9 145.8,121.19 U10.28 ; C27.2 v2(128.6,118) ; R35.1 v2(128.6,120) ; R29.2 v2(149.2,125.9)
  TOP w0.127: R28.2 v1(141.4,109.61)
  TOP w1: U15.5 101.65,130.41 103.21,128.85 C54.2 v1(105.33,128.85)
5V_A: length 56.4
  TOP w0.127: v1(135.73,35.36) 136.2,35.83 C59.1 ; C71.1 146.25,36.7 v1(145.44,37.51) ; R84.2 v1(125.04,46.59) ; D27.2 v1(135.07,20.47)
  TOP w0.2: v1(120.2,39.69) R80.2 121.7,39.77 122.35,40.42 122.35,40.77 123.13,41.55 C55.1 ; C55.1 124.82,41.63 125.94,40.51 U22.5 ; C55.1 v1(123.13,43.54) ; U16.16 156.79,71.33 156.34,71.77 C73.1 154.84,72.7 v1(154.65,72.51) ; D23.2 v1(94.93,31) ; U18.16 148.95,36.82 148.85,36.72 147.99,36.72 147.97,36.7 C71.1 ; U21.5 138.58,36.15 138.26,35.83 C59.1
  TOP w1: L3.2 105.79,105.87 105.78,105.87 C88.1
  BOTTOM w1: v1(154.65,72.51) 160.79,78.65 160.79,88.44 159.15,90.08 v1(159.15,91.27) 158.42,92 v1(158.42,95.25)
  vias: v1(100.4,60.21) v1(101.97,60.23) v1(104.87,98.9) v1(104.87,97.7) v1(104.87,96.5) v1(105.87,98.9) v1(105.87,97.7) v1(105.87,96.5)
5V_D: length 82.5
  TOP w0.2: R1.2 v1(132.7,108.7) ; C20.2 111.69,94.8 111.62,94.87 U9.16 109.95,95.4 v1(109.46,95.88) ; R30.2 v1(156.49,126.06) ; C19.2 118.84,98.28 v1(118.41,98.71) 118.41,99.26 119.15,100 U5.14 ; v1(118.45,107.53) U6.14 120.11,107 120.27,106.84 C17.2 ; C18.2 109.65,105.98 109.35,106.28 v1(109.35,106.81) 109.92,107.38 111.55,107.38 ; R2.2 v1(132.66,106.3)
  TOP w1: v1(111.1,121.47) C89.1 106.6,121.47 C90.1 105.24,121.47 105.23,121.48 L4.2
  POWER PLANE w0.2: 129.22,102.55 130.13,101.64 155.63,101.64 157.09,103.1 157.09,125.46 v1(156.49,126.06) ; 129.19,102.67 129.19,102.86
  vias: v1(109.45,86.59) v1(109.49,87.79) v1(118.34,91.32) v1(118.34,89.4) v1(118.36,93.27)
15V_A: length 37.9
  TOP w0.127: R23.2 v1(135.26,69.77) ; C9.2 v1(113.71,59.09) ; Q1.3 v1(129.5,62.24) ; U20.8 159.46,81.09 159.34,80.98 C72.1 v1(158.3,79.51)
  TOP w0.2: C9.2 111.23,59.09 111.07,58.93 U3.8 ; v1(103.99,36.2) C60.1 101.41,36.2 101.41,36.2 U4.8 ; v1(132.46,31.25) C63.1 135.3,31.25 135.47,31.42 U23.8 ; U19.8 150.1,48.04 150.2,47.95 C62.1 v1(150.2,44.74) ; v1(152.05,58.36) 152.59,57.82 153.37,57.82 154.1,57.09 154.1,54.41 153.58,54.41 153.38,54.61 C61.1
  TOP w1: C96.1 95.04,105.87 95.17,106 L7.2
  BOTTOM w1: v1(150.2,44.74) 151,43.94 v1(151,40.59)
  vias: v1(93.96,98.84) v1(93.96,97.64) v1(93.96,96.44) v1(94.96,98.84) v1(94.96,97.64) v1(94.96,96.44) v1(95.07,64.95) v1(96,63.79) v1(96.13,66.1) v1(97.13,64.99) v1(98.19,66.11) v1(103.35,59.04) v1(103.41,57.62) v1(104.62,60.16) v1(104.63,58.51)
-5V: length 88.9
  TOP w1: 59.24,112.51 58.81,112.08 D14.1 ; 59.24,112.51 D17.1 ; 59.24,112.51 58.74,112.51 57.2,114.04 57.2,116.23 56.72,116.71 C40.2 56.72,123.23 56.75,123.26 C41.2 56.75,127.4 56.74,127.42 R40.1 56.74,132.64 58.2,134.1 91.1,134.1 93.2,132 93.2,125.3 97.85,120.65 97.85,112.36 100.4,109.81 L5.1
-5V_A: length 7.5
  TOP w0.2: D24.1 v1(91.18,29.09) ; D30.1 v1(134.94,22.51)
  TOP w1: L5.2 100.48,105.93 100.41,105.87 C92.1
  vias: v1(99.3,98.81) v1(99.3,97.61) v1(99.3,96.41) v1(100.3,98.81) v1(100.3,97.61) v1(100.3,96.41)
-15V: length 60.5
  TOP w1: D21.1 73.3,112.08 73.73,112.51 74.95,112.51 ; L9.1 89.86,129.66 88.86,130.66 73.55,130.66 72.7,129.81 R53.1 72.7,127.59 72.3,127.2 C50.2 C49.2 72.3,115.15 74.95,112.51 ; 74.95,112.51 D22.1
-15V_A: length 69.5
  TOP w0.127: U20.4 165.83,85.4 166.02,85.58 C56.1 v1(167.4,86.79) ; C64.1 v1(143.65,26.04) ; C10.2 v1(102.96,64.28)
  TOP w0.2: 139.81,26.04 142.02,26.04 142.02,26.04 C64.1 ; v1(158.18,44.65) C57.1 158.18,47.74 157.91,48 U17.4 ; v1(92.59,41.58) C74.1 95.11,41.58 95.11,41.58 U4.4 ; U3.4 105.88,64.31 105.85,64.28 C10.2 ; v1(145.74,58.37) 146.25,57.86 C58.1 146.25,55.52 146.3,55.48 U19.4
  TOP w1: L9.2 89.86,106.06 89.66,105.87 C100.1
  POWER PLANE w1: v1(145.74,58.37) 148.47,55.64 v1(148.47,51.67) ; v1(102.96,64.28) 102.96,68.99 v1(101.92,70.03)
  BOTTOM w1: v1(158.18,44.65) 155.49,44.65 v1(148.47,51.67) ; v1(92.59,41.58) v1(88.74,41.58) ; v1(101.92,70.03) v1(89.68,70.03)
  vias: v1(88.6,98.74) v1(88.6,97.54) v1(88.6,96.34) v1(89.6,98.74) v1(89.6,97.54) v1(89.6,96.34)
GND_SIGNAL: length 24.4
  TOP w0.127: C42.1 80.38,51.66 80.49,51.55 v2(81.25,51.55) ; v2(70.8,49.7) 70.46,50.04 69.63,50.04 69.44,49.85 D15.1 ; v2(61.9,49.6) 62.38,50.07 C39.1 ; C44.2 74.67,56.84 v2(74.24,56.41) ; U12.5 70.57,55.83 v2(69.9,56.5) ; C43.1 81,56.91 v2(81.63,56.28) ; v2(81.77,86.88) 81.9,86.75 R59.1 81.9,83.41 81.94,83.38 C51.1
  TOP w1: D7.2 20.58,65.37 21.57,66.35 v2(21.76,66.35) ; v2(63.74,62.03) D18.1 65.35,58.52 R44.1 ; R41.1 v1(70.06,78.83)
0: length 42.6
  TOP w0.09: v2(103.56,132.18) 104.07,132.18 ; v2(103.56,132.18) 103.05,132.18 ; v2(103.56,132.18) 103.56,132.69 ; U11.2 v1(124.81,130.27)
  TOP w0.127: 161.31,90.51 161.13,90.33 ; U14.3 77.46,107.62 v2(77.71,107.87) ; C71.2 146.34,35.28 v1(145.42,36.2) ; C25.1 v1(143.6,109.56) ; 114.25,67.55 R13.1
  TOP w0.2: R18.1 101.86,46.94 v1(101.39,47.41) 101.03,47.05 99.13,47.05 98.82,46.74 R22.1 ; 124.23,105.04 124.23,104.32 ; 102.12,38.26 102.16,38.3
  TOP w0.5: v1(93.61,102.8) 92.9,103.51 C96.2 ; C88.2 103.65,103.44 104.28,102.81 104.35,102.81 ; v1(98.98,102.81) 98.28,103.51 C92.2 ; v1(88,102.7) 87.53,103.17 C100.2
  TOP w1: R53.2 v1(75.76,128.7) ; C90.2 v2(106.6,117) ; R40.2 v1(59.95,128.7) ; R60.1 80.8,107.95 v2(80.02,108.73) ; C54.1 v2(103.56,132.18) ; R48.1 v1(63.03,128.7) ; C89.2 v2(108.86,116.96)
  GND PLANE w0.09: 103.56,131.62 v2(103.56,132.18) ; v2(103.56,132.18) 103.56,132.74 ; v2(103.56,132.18) 103,132.18 ; v2(103.56,132.18) 104.12,132.18
  BOTTOM w0.09: 103.05,132.18 v2(103.56,132.18) ; v2(103.56,132.18) 103.56,131.67 ; v2(103.56,132.18) 103.56,132.69 ; v2(103.56,132.18) 104.07,132.18
  vias: v1(42.4,136.09) v1(42.4,134.82) v1(42.4,133.55) v1(42.4,132.28) v1(42.4,131.01) v1(42.4,129.74) v1(42.4,128.47) v1(42.4,127.2) v1(42.4,125.93) v1(42.4,124.66) v1(42.4,123.39) v1(42.4,122.12) v1(42.4,120.85) v1(42.4,119.58) v1(42.4,118.31) v1(42.4,117.04) v1(42.4,115.77) v1(42.4,114.5) v1(42.4,113.23) v1(42.4,111.96) v1(42.4,110.69) v1(42.4,109.42) v1(42.4,108.15) v1(42.4,106.88) v1(42.4,105.61) v1(42.4,104.34) v1(43.17,137.1) v1(43.33,103.47) v1(44.34,102.58) v1(44.44,137.1) v1(45.21,101.53) v1(45.71,137.1) v1(46.11,100.66) v1(46.98,137.1) v1(47.12,99.77) v1(48.25,137.1) v1(48.51,99.75) v1(49.52,137.1) v1(49.8,99.7) v1(50.79,137.1) v1(51.26,99.76) v1(52.06,137.1) v1(52.68,99.68) v1(53.33,137.1) v1(54.05,99.73) v1(54.6,137.1) v1(55.59,99.76) v1(55.87,137.1) v1(56.96,99.84) v1(57.14,137.1) v1(58.23,99.84) v1(58.41,137.1) v1(59.5,99.84) v1(59.68,137.1) v1(60.77,99.84) v1(60.95,137.1) v1(62.04,99.84) v1(62.22,137.1) v1(63.31,99.84) v1(63.49,137.1) v1(64.58,99.84) v1(64.76,137.1) v1(66.03,137.1) v1(65.99,99.82) v1(67.3,137.1) v1(67.29,99.85) v1(68.57,137.1) v1(68.56,99.85) v1(69.84,137.1) v1(69.83,99.85) v1(71.11,137.09) v1(71.1,99.85) v1(72.38,137.09) v1(72.37,99.85) v1(73.65,137.09) v1(73.73,96.58) v1(73.84,93.96) v1(74.92,137.09) v1(75.02,94) v1(76.19,137.09) v1(76.29,94) v1(77.46,137.09) v1(77.56,94) v1(78.73,137.09) v1(78.83,94) v1(80,137.09) v1(80.1,94) v1(81.27,137.09) v1(81.37,94) v1(82.54,137.09) v1(82.64,94) v1(83.81,137.09) v1(83.91,94) v1(85.08,137.09) v1(85.18,94) v1(85.31,107.96) v1(85.31,106.69) v1(85.31,105.42) v1(85.31,104.15) v1(85.31,102.88) v1(85.31,101.61) v1(85.31,100.34) v1(85.31,99.07) v1(85.31,97.8) v1(85.31,96.53) v1(85.31,95.26) v1(86.35,137.09) v1(87.3,109.01) v1(87.3,107.74) v1(87.3,106.47) v1(87.3,100.12) v1(87.3,98.85) v1(87.3,97.58) v1(87.3,96.31) v1(87.3,95.04) v1(87.3,93.77) v1(87.3,92.5) v1(87.3,91.23) v1(87.3,89.96) v1(87.3,88.69) v1(87.3,87.42) v1(87.3,86.15) v1(87.3,84.88) v1(87.3,83.61) v1(87.3,82.34) v1(87.3,81.07) v1(87.3,79.8) v1(87.3,78.53) v1(87.3,77.26) v1(87.3,75.99) v1(87.3,74.72) v1(87.3,73.45) v1(87.3,72.18) v1(87.3,70.91) v1(87.3,69.64) v1(87.3,68.37) v1(87.3,67.1) v1(87.3,65.83) v1(87.3,64.56) v1(87.3,63.29) v1(87.3,62.02) v1(87.3,60.75) v1(87.3,59.48) v1(87.3,58.21) v1(87.3,56.94) v1(87.3,55.67) v1(87.3,54.4) v1(87.3,53.13) v1(87.3,51.86) v1(87.3,50.59) v1(87.3,49.32) v1(87.3,48.05) v1(87.3,46.78) v1(87.3,45.51) v1(87.3,44.24) v1(87.3,42.97) v1(87.3,41.7) v1(87.3,40.43) v1(87.3,39.16) v1(87.3,37.89) v1(87.3,36.62) v1(87.3,35.35) v1(87.3,34.08) v1(87.3,32.81) v1(87.3,31.54) v1(87.3,30.27) v1(87.3,29) v1(87.3,27.73) v1(87.3,26.46) v1(87.3,25.19) v1(87.3,23.92) v1(87.3,22.65) v1(87.3,21.38) v1(87.3,20.11) v1(87.3,18.84) v1(87.3,17.57) v1(87.3,16.3) v1(87.3,15.03) v1(87.3,13.76) v1(87.3,12.49) v1(87.3,11.22) v1(87.3,9.95) v1(87.3,8.68) v1(87.3,7.41) v1(87.3,6.14) v1(87.3,4.87) v1(87.3,3.69) v1(87.3,2.5) v1(87.62,137.09) v1(88.57,2.5) v1(88.89,137.09) v1(89.84,2.5) v1(90.16,137.09) v1(91.11,2.5) v1(91.43,137.09) v1(91.8,97) v1(91.8,87) v1(91.8,77) v1(91.8,67) v1(91.8,57) v1(91.8,47) v1(91.8,37) v1(91.8,27) v1(91.8,17) v1(91.8,7) v1(92.38,2.5) v1(92.7,137.09) v1(93.65,2.5) v1(93.97,137.09) v1(94.92,2.5) v1(95.24,137.09) v1(95.38,23.67) v1(95.38,22.4) v1(95.38,21.13) v1(95.38,19.86) v1(95.38,18.59) v1(95.38,17.32) v1(96.19,2.5) v1(96.51,137.09) v1(96.8,102) v1(96.8,92) v1(96.8,82) v1(96.8,72) v1(96.8,62) v1(96.8,12) v1(97.18,23.54) v1(97.18,22.27) v1(97.18,21) v1(97.18,19.73) v1(97.41,16.69) v1(97.49,18.49) v1(97.46,2.5) v1(97.78,137.09) v1(98.73,2.5) v1(98.76,18.49) v1(99.05,137.09) v1(100.03,18.49) v1(99.95,16.69) v1(100,2.5) v1(100.32,137.09) v1(100.89,34.58) v1(100.87,32.78) v1(101.22,16.69) v1(101.3,18.49) v1(101.27,2.5) v1(101.43,136.47) v1(101.43,135.2) v1(101.43,133.93) v1(101.43,132.66) v1(101.8,97) v1(101.8,87) v1(101.8,77) v1(101.8,67) v1(101.8,7) v1(102.14,32.78) v1(102.16,34.58) v1(102.49,16.69) v1(102.54,2.5) v1(102.57,18.49) v1(102.92,136.35) v1(102.92,135.08) v1(102.92,133.81) v1(103.22,115.85) v1(103.43,34.58) v1(103.41,32.78) v1(103.84,18.49) v1(103.76,16.69) v1(103.81,2.5) v1(103.94,137.1) v1(104.49,115.85) v1(104.7,34.58) v1(104.68,32.78) v1(105.03,16.69) v1(105.11,18.49) v1(105.08,2.5) v1(105.21,137.1) v1(105.22,43.27) v1(105.22,42) v1(105.22,40.73) v1(105.22,39.46) v1(105.22,38.19) v1(105.22,36.92) v1(105.22,35.65) v1(105.22,30.57) v1(105.22,29.3) v1(105.52,28.07) v1(105.99,115.77) v1(106.42,27.17) v1(106.35,2.5) v1(106.48,137.1) v1(106.8,82) v1(106.8,72) v1(106.8,62) v1(106.8,52) v1(106.8,22) v1(106.8,12) v1(107.04,102.77) v1(107.04,101.5) v1(107.04,100.23) v1(107.04,98.96) v1(107.04,97.69) v1(107.04,96.42) v1(107.04,95.15) v1(107.04,93.88) v1(107.04,92.61) v1(107.04,91.34) v1(106.96,89.84) v1(106.96,88.57) v1(106.96,87.3) v1(106.96,86.03) v1(106.96,84.76) v1(107.03,42.78) v1(107.03,40.24) v1(107.03,38.97) v1(107.03,37.7) v1(107.03,36.43) v1(107.03,31.35) v1(107.03,30.08) v1(107.24,34.58) v1(107.22,32.78) v1(107.26,115.77) v1(107.31,28.84) v1(107.65,26.85) v1(107.62,2.5) v1(108.05,84.3) v1(107.98,43.62) v1(108.53,115.77) v1(108.51,34.58) v1(108.49,32.78) v1(108.56,28.65) v1(108.63,18.49) v1(108.92,26.85) v1(108.89,2.5) v1(109.13,110.27) v1(109.13,109) v1(109.07,16.69) v1(109.21,114.31) v1(109.21,113.04) v1(109.21,111.77) v1(109.41,84.28) v1(109.51,98.33) v1(109.51,97.06) v1(109.49,90.4) v1(109.49,89.13) v1(109.59,102.37) v1(109.59,101.1) v1(109.59,99.83) v1(109.57,94.44) v1(109.57,93.17) v1(109.57,91.9) v1(109.78,34.58) v1(109.76,32.78) v1(109.83,28.65) v1(109.9,18.49) v1(110.19,26.85) v1(110.16,2.5) v1(110.34,16.69) v1(110.63,84.33) v1(110.77,86.56) v1(111.05,34.58) v1(111.03,32.78) v1(111.1,28.65) v1(111.21,73.82) v1(111.17,18.49) v1(111.43,2.5) v1(111.46,26.85) v1(111.56,137.1) v1(111.61,16.69) v1(111.8,77) v1(111.8,37) v1(111.8,7) v1(111.9,84.33) v1(112.04,86.56) v1(112.32,34.58) v1(112.3,32.78) v1(112.37,28.65) v1(112.44,18.49) v1(112.7,2.5) v1(112.83,137.1) v1(112.88,16.69) v1(113.17,84.33) v1(113.31,86.56) v1(113.6,73.11) v1(113.59,34.58) v1(113.57,32.78) v1(113.64,28.65) v1(113.71,18.49) v1(113.97,2.5) v1(114.1,137.1) v1(114.15,16.69) v1(114.44,84.33) v1(114.52,76.07) v1(114.5,74.01) v1(114.58,86.56) v1(114.84,32.78) v1(114.86,34.58) v1(114.91,28.65) v1(114.98,18.49) v1(115.24,2.5) v1(115.37,137.1) v1(115.42,16.69) v1(115.71,84.33) v1(115.75,74.27) v1(115.85,86.56) v1(115.79,76.07) v1(115.98,27.97) v1(116.13,34.58) v1(116.11,32.78) v1(116.25,18.49) v1(116.51,2.5) v1(116.64,137.1) v1(116.57,16.15) v1(116.8,82) v1(116.8,72) v1(116.8,42) v1(116.8,12) v1(116.98,84.33) v1(117.02,74.27) v1(117.02,27.24) v1(117.12,86.56) v1(117.06,76.07) v1(117.4,34.58) v1(117.38,32.78) v1(117.4,24.13) v1(117.4,22.86) v1(117.4,21.59) v1(117.4,20.32) v1(117.4,19.05) v1(117.78,2.5) v1(117.91,137.1) v1(118.25,84.33) v1(118.33,76.07) v1(118.29,74.27) v1(118.39,86.56) v1(118.65,32.78) v1(118.67,34.58) v1(119.05,2.5) v1(119.2,23.32) v1(119.2,22.05) v1(119.2,20.78) v1(119.2,19.51) v1(119.2,18.24) v1(119.2,16.97) v1(119.52,84.33) v1(119.6,76.07) v1(119.56,74.27) v1(119.94,34.58) v1(119.92,32.78) v1(120.32,2.5) v1(120.56,76.92) v1(120.79,84.33) v1(120.79,74.59) v1(121.21,34.58) v1(121.19,32.78) v1(121.45,77.81) v1(121.59,2.5) v1(121.68,75.48) v1(121.8,67) v1(121.8,47) v1(121.8,37) v1(121.8,27) v1(121.8,17) v1(121.8,7) v1(122.06,84.33) v1(122.35,78.71) v1(122.48,34.58) v1(122.46,32.78) v1(122.58,76.38) v1(122.86,2.5) v1(122.99,137.1) v1(123.27,88.5) v1(123.27,87.23) v1(123.27,85.96) v1(123.27,84.69) v1(123.27,83.42) v1(123.27,82.15) v1(123.27,80.88) v1(123.25,79.61) v1(123.48,77.28) v1(123.75,34.58) v1(123.73,32.78) v1(124.15,75.27) v1(124.15,74) v1(124.15,72.73) v1(124.15,71.46) v1(124.15,70.19) v1(124.15,68.92) v1(124.15,67.65) v1(124.15,66.38) v1(124.13,2.5) v1(124.26,137.1) v1(124.38,78.18) v1(124.66,65.23) v1(124.86,76.33) v1(125.02,34.58) v1(125,32.78) v1(125.07,86.86) v1(125.07,85.59) v1(125.07,84.32) v1(125.07,83.05) v1(125.07,81.78) v1(125.07,80.51) v1(125.07,79.24) v1(125.4,2.5) v1(125.53,137.1) v1(125.76,77.22) v1(125.95,74.24) v1(125.95,72.97) v1(125.95,71.7) v1(125.95,70.43) v1(125.95,69.16) v1(125.95,67.89) v1(126.29,34.58) v1(126.27,32.78) v1(126.49,75.4) v1(126.65,78.12) v1(126.67,2.5) v1(126.8,137.1) v1(126.8,82) v1(126.8,62) v1(126.8,52) v1(126.8,22) v1(127.3,100.55) v1(127.38,76.29) v1(127.54,32.78) v1(127.55,79.02) v1(127.94,2.5) v1(128.07,137.1) v1(128.2,97.9) v1(128.2,91.55) v1(128.2,90.28) v1(128.2,89.01) v1(128.2,87.74) v1(128.2,86.47) v1(128.2,85.2) v1(128.2,83.93) v1(128.2,82.66) v1(128.2,81.39) v1(128.2,80.12) v1(128.28,77.19) v1(128.51,100.14) v1(128.83,34.58) v1(128.81,32.78) v1(129.18,78.09) v1(129.21,2.5) v1(129.34,137.1) v1(129.4,99.25) v1(130,98.13) v1(130,96.86) v1(130,95.59) v1(130,94.32) v1(130,93.05) v1(130,91.78) v1(130,90.51) v1(130,89.24) v1(130,87.97) v1(130,86.7) v1(130,85.43) v1(130,84.16) v1(130,82.89) v1(130,81.62) v1(130,80.35) v1(129.98,79.08) v1(130.1,34.58) v1(130.08,32.78) v1(130.48,2.5) v1(130.61,137.1) v1(131.22,99.23) v1(131.37,34.58) v1(131.35,32.78) v1(131.47,97.26) v1(131.45,95.98) v1(131.45,94.71) v1(131.45,93.44) v1(131.45,92.17) v1(131.45,90.9) v1(131.45,89.63) v1(131.45,88.36) v1(131.45,87.09) v1(131.45,85.82) v1(131.45,84.55) v1(131.8,77) v1(131.8,67) v1(131.8,37) v1(131.8,17) v1(131.8,7) v1(131.75,2.5) v1(131.88,137.1) v1(132.49,99.23) v1(132.62,32.78) v1(132.74,97.26) v1(133.02,2.5) v1(133.15,137.1) v1(133.76,99.23) v1(134.01,97.26) v1(134.29,2.5) v1(134.42,137.1) v1(135.03,99.23) v1(135.28,97.26) v1(135.56,2.5) v1(135.69,137.1) v1(136.3,99.23) v1(136.55,97.26) v1(136.8,92) v1(136.8,82) v1(136.8,62) v1(136.8,52) v1(136.8,42) v1(136.8,12) v1(136.83,2.5) v1(136.96,137.1) v1(137.77,99.2) v1(137.82,97.26) v1(138.1,2.5) v1(138.23,137.1) v1(138.3,19.04) v1(138.3,17.77) v1(139.04,99.2) v1(138.99,34.58) v1(139.09,97.26) v1(139.18,24) v1(139.37,2.5) v1(139.5,137.1) v1(140.1,18.24) v1(140.31,99.2) v1(140.26,34.58) v1(140.36,97.26) v1(140.64,2.5) v1(140.77,137.1) v1(141.15,21.61) v1(141.53,34.58) v1(141.58,99.2) v1(141.63,97.26) v1(141.58,23.41) v1(141.8,87) v1(141.8,77) v1(141.8,17) v1(141.8,7) v1(141.91,2.5) v1(142.04,137.1) v1(142.42,21.64) v1(142.85,99.2) v1(142.78,32.78) v1(142.84,23.38) v1(142.9,97.26) v1(142.9,69.6) v1(143.18,2.5) v1(143.31,137.1) v1(143.72,28.11) v1(143.72,24.3) v1(143.69,21.65) v1(144.05,32.78) v1(144.45,2.5) v1(144.58,137.1) v1(144.72,22.39) v1(145.46,27.23) v1(145.46,24.69) v1(145.46,23.42) v1(145.72,2.5) v1(145.85,137.1) v1(146.23,28.28) v1(146.8,22) v1(146.8,12) v1(146.99,2.5) v1(147.12,137.1) v1(147.5,28.28) v1(147.77,41.86) v1(148.26,2.5) v1(148.39,137.1) v1(148.77,28.28) v1(149.53,2.5) v1(149.66,137.1) v1(150.31,98.27) v1(150.81,65.52) v1(150.81,63.92) v1(150.8,2.5) v1(150.93,137.1) v1(151.27,99.1) v1(151.31,28.28) v1(151.46,97.61) v1(151.8,87) v1(151.8,77) v1(151.8,27) v1(151.8,17) v1(151.8,7) v1(152.12,57.16) v1(152.07,2.5) v1(152.2,137.1) v1(152.31,63.99) v1(152.38,65.52) v1(152.54,99.1) v1(152.58,28.28) v1(152.73,97.61) v1(153.34,2.5) v1(153.38,24) v1(153.47,137.1) v1(153.81,99.1) v1(153.77,25.81) v1(153.85,28.28) v1(154,97.61) v1(154.65,24) v1(154.61,2.5) v1(154.74,137.1) v1(155.04,25.81) v1(155.08,99.1) v1(155.12,28.28) v1(155.27,97.61) v1(155.63,30.08) v1(155.92,24) v1(155.88,2.5) v1(156.01,137.1) v1(156.31,25.81) v1(156.35,99.1) v1(156.39,28.28) v1(156.54,97.61) v1(156.8,82) v1(156.8,52) v1(156.8,32) v1(156.8,22) v1(156.8,12) v1(156.9,30.08) v1(157.15,2.5) v1(157.19,24) v1(157.28,137.1) v1(157.44,86.76) v1(157.44,85.49) v1(157.44,84.22) v1(157.46,82.95) v1(157.62,99.1) v1(157.58,25.81) v1(157.66,28.28) v1(157.81,97.61) v1(158.17,30.08) v1(158.43,65.38) v1(158.37,23.55) v1(158.42,2.5) v1(158.55,137.1) v1(158.84,25.63) v1(158.89,99.1) v1(158.93,28.28) v1(158.98,72.21) v1(159.08,97.61) v1(159.1,22.5) v1(159.1,21.23) v1(159.1,19.96) v1(159.1,18.69) v1(159.1,17.42) v1(159.24,87.04) v1(159.24,85.77) v1(159.32,64.27) v1(159.44,30.08) v1(159.74,24.74) v1(159.69,2.5) v1(159.82,137.1) v1(160.16,99.1) v1(160.2,28.28) v1(160.35,97.61) v1(160.51,31.12) v1(160.64,23.84) v1(160.9,22.05) v1(160.9,20.78) v1(160.9,19.51) v1(160.9,18.24) v1(160.9,16.97) v1(160.96,2.5) v1(161.09,137.1) v1(161.1,29.14) v1(161.43,99.1) v1(161.62,97.61) v1(161.62,32.35) v1(161.8,87) v1(161.8,57) v1(161.8,47) v1(161.8,37) v1(161.8,27) v1(161.8,7) v1(161.93,30.07) v1(162.23,2.5) v1(162.36,137.1) v1(162.7,99.1) v1(162.66,33.32) v1(162.89,97.61) v1(162.92,30.98) v1(163.5,2.5) v1(163.63,137.1) v1(163.58,34.28) v1(163.91,97.38) v1(163.94,31.85) v1(163.97,99.1) v1(164.47,35.24) v1(164.77,2.5) v1(164.9,137.1) v1(164.88,32.84) v1(165.01,61.53) v1(165.24,99.1) v1(165.18,97.38) v1(165.21,60.26) v1(165.21,58.99) v1(165.21,57.72) v1(165.21,56.45) v1(165.21,55.18) v1(165.21,53.91) v1(165.21,52.64) v1(165.21,51.37) v1(165.21,50.1) v1(165.21,48.83) v1(165.21,47.56) v1(165.21,46.29) v1(165.21,45.02) v1(165.21,43.75) v1(165.21,42.48) v1(165.21,41.21) v1(165.21,39.94) v1(165.21,38.67) v1(165.21,37.4) v1(165.21,36.13) v1(165.88,33.87) v1(166.04,2.5) v1(166.17,137.1) v1(166.51,99.1) v1(166.45,97.38) v1(166.8,92) v1(166.76,34.93) v1(166.8,12) v1(167.02,60.29) v1(167.02,59.02) v1(167.02,57.75) v1(167.02,56.48) v1(167.02,55.21) v1(167.02,53.94) v1(167.02,52.67) v1(167.02,51.4) v1(167.02,50.13) v1(167.02,48.86) v1(167.02,47.59) v1(167.02,46.32) v1(167.02,45.05) v1(167.02,43.78) v1(167,42.5) v1(167.02,41.24) v1(167.02,39.97) v1(167.02,38.7) v1(167.02,37.43) v1(167.02,36.16) v1(167.3,65.37) v1(167.32,64.1) v1(167.32,62.93) v1(167.32,61.66) v1(167.31,2.5) v1(167.44,137.1) v1(167.72,97.38) v1(167.78,99.1) v1(168.58,2.5) v1(168.71,137.1) v1(168.99,97.38) v1(169.05,99.1) v1(169.85,2.5) v1(169.98,137.1) v1(170.32,99.1) v1(170.26,97.38) v1(171.12,2.5) v1(171.25,137.1) v1(171.53,97.38) v1(171.59,99.1) v1(171.8,87) v1(171.8,77) v1(171.8,67) v1(171.8,57) v1(171.8,47) v1(171.8,37) v1(171.8,17) v1(171.8,7) v1(172.39,2.5) v1(172.52,137.1) v1(172.8,97.38) v1(172.86,99.1) v1(173.7,136.62) v1(173.7,135.35) v1(173.7,134.08) v1(173.7,132.81) v1(173.7,131.54) v1(173.7,130.27) v1(173.7,129) v1(173.7,127.73) v1(173.7,126.46) v1(173.7,125.19) v1(173.7,123.92) v1(173.7,122.65) v1(173.7,119.68) v1(173.7,118.41) v1(173.7,116.18) v1(173.7,114.91) v1(173.7,112.06) v1(173.7,110.79) v1(173.7,109.52) v1(173.7,108.25) v1(173.7,106.98) v1(173.7,105.71) v1(173.7,104.44) v1(173.7,103.17) v1(173.7,101.32) v1(173.7,100.05) v1(173.7,96.48) v1(173.7,95.21) v1(173.7,93.94) v1(173.7,92.67) v1(173.7,91.4) v1(173.7,90.13) v1(173.7,88.86) v1(173.7,87.59) v1(173.7,86.32) v1(173.7,85.05) v1(173.7,83.78) v1(173.7,82.51) v1(173.7,81.24) v1(173.7,79.97) v1(173.7,78.7) v1(173.7,77.43) v1(173.7,76.16) v1(173.7,74.89) v1(173.7,73.62) v1(173.7,72.35) v1(173.7,71.08) v1(173.7,69.81) v1(173.7,68.54) v1(173.7,67.27) v1(173.7,66) v1(173.7,64.73) v1(173.7,63.46) v1(173.7,62.19) v1(173.7,60.92) v1(173.7,59.65) v1(173.7,58.38) v1(173.7,57.11) v1(173.7,55.84) v1(173.7,54.57) v1(173.7,53.3) v1(173.7,52.03) v1(173.7,50.76) v1(173.7,49.49) v1(173.7,48.22) v1(173.7,46.95) v1(173.7,45.68) v1(173.7,44.41) v1(173.7,43.14) v1(173.7,41.87) v1(173.7,40.6) v1(173.7,39.33) v1(173.7,38.06) v1(173.7,36.79) v1(173.7,35.52) v1(173.7,34.25) v1(173.7,32.98) v1(173.7,31.71) v1(173.7,30.44) v1(173.7,29.17) v1(173.7,27.9) v1(173.7,26.63) v1(173.7,25.36) v1(173.7,24.09) v1(173.7,22.82) v1(173.7,21.55) v1(173.7,20.28) v1(173.7,19.01) v1(173.7,17.74) v1(173.7,16.47) v1(173.7,15.2) v1(173.7,13.93) v1(173.7,12.66) v1(173.7,11.39) v1(173.7,10.12) v1(173.7,8.85) v1(173.7,7.58) v1(173.7,6.31) v1(173.7,5.04) v1(173.7,3.77) v1(173.66,2.5)
1KHZ_0PHASE: length 29
  TOP w0.2: U8.9 124.43,90.03 124.17,89.77 124.17,79.25 120.09,75.17 114.38,75.17 112.96,73.75 112.18,73.75 112.11,73.82 ; UNK5V_SQ_1KHZ1.1 112.14,73.85 112.11,73.82 ; 112.11,73.82 R7.1
+ DRIVE: length 20.5
  TOP w0.2: R62.1 116.41,17.59 J9.1 118.3,24.26 118.29,24.27 R15.2
+ SENSE: length 19.6
  TOP w0.2: 96.28,16.83 C67.1 96.28,24.94 ; 96.28,16.83 J8.1 ; 96.28,16.83 97.04,17.59 R62.2
- DRIVE: length 36.7
  TOP w0.127: 141.64,22.51 143.61,22.51 144.59,23.49 144.59,29.74 144.08,30.25 C86.1
  TOP w0.2: J11.1 139.2,19.55 139.28,19.63 D27.1 139.28,21.62 139.23,21.67 D30.2 ; D30.2 141.64,22.51 ; D30.2 139.23,22.66 137.26,24.63 U23.2 ; R69.1 150.32,25.54 150.3,25.56 150.3,26.05 149.37,26.98 U18.1 148.95,31.02 148.63,30.71 R82.1 147.21,30.71 147.18,30.74 R79.1 145.3,30.74 145.11,30.93 144.72,30.93 144.71,30.92 C86.1
- SENSE: length 23.4
  TOP w0.2: 151.74,24.91 R69.2 ; 151.74,24.91 151.74,25.3 150.03,27.01 U18.2 ; 151.74,24.91 158.29,24.91 160,23.2 J10.1
A_PGA_CONTROL: length 91.3
  TOP w0.09: 132.73,124.4 131.09,124.4 130.14,125.34 v2(129.67,125.34)
  TOP w0.127: v1(159.24,66.48) 158.31,67.41 U16.10 ; v1(145.89,96.43) 145.89,95.93 146.07,95.75 146.07,68.83 v1(147.51,67.39)
  BOTTOM w0.127: v1(159.24,66.48) 158.33,67.39 v1(147.51,67.39) ; v2(129.67,125.34) 131.6,125.34 131.73,125.22 131.73,102.21 133.25,100.69 145.14,100.69 145.89,99.94 v1(145.89,96.43)
B_PGA_CONTROL: length 87.8
  TOP w0.09: v2(129.67,124.14) 130.26,124.14 130.81,123.59 U10.3
  TOP w0.127: v1(145.43,95.23) 145.43,67.93 v1(147.44,65.92) ; v1(157.32,65.66) 157.32,66.35 157.34,66.36 U16.9
  BOTTOM w0.127: v1(147.44,65.92) 150.51,65.92 150.6,66.02 151.02,66.02 151.11,65.92 151.94,65.92 152.2,66.19 152.62,66.19 152.88,65.92 157.06,65.92 v1(157.32,65.66) ; v1(145.43,95.23) 145.21,95.45 145.21,99.88 144.67,100.42 133.16,100.42 131.46,102.12 131.46,123.78 131.1,124.14 v2(129.67,124.14)
BANDPASS2_OUT: length 91.8
  TOP w0.2: v1(162.21,79.81) 162.21,82.07 161.91,82.37 U20.7 159.14,82.37 158.34,83.17 C1.1 ; C82.2 166.09,65.12 166.11,65.1 R74.2 166.11,62.52 166.11,62.52 v1(166.11,61.99) ; 139.81,31.42 140.88,31.42 v1(141.05,31.59)
  BOTTOM w0.2: v1(141.05,31.59) 141.05,30.42 142.29,29.18 159.68,29.18 166.11,35.61 v1(166.11,61.99) 162.21,65.89 v1(162.21,79.81)
CLK_1MHZ: length 9.8
  TOP w0.2: U6.6 124.18,113.88 122.27,111.97 118.96,111.97 118.19,111.19 U7.4
CLK_8MHZ: length 46.6
  TOP w0.2: U6.3 131.26,110.07 133.01,111.82 133.01,115.64 135.71,118.34 135.71,120.58 138.51,123.38 v1(141.94,123.38) ; Q2.3 155.27,123.37 155.31,123.33 R30.1 157.2,123.33 157.25,123.38 v1(158.72,123.38)
  BOTTOM w0.2: v1(141.94,123.38) v1(158.72,123.38)
CLK_16MHZ_D: length 0.7
  TOP w0.2: U5.5 U5.4
CURRENT_GAIN: length 118.4
  TOP w0.09: U10.41 136.79,127.92 136.64,128.07 v2(136.64,129.52)
  TOP w0.2: v1(144.19,38.84) 140.95,38.84 139.98,37.87 139.98,35.63 139.83,35.49 U21.6 ; U18.9 153.95,35.69 v1(153.06,34.8)
  BOTTOM w0.127: v2(136.64,129.52) 136.64,120.95 146.6,110.99 146.6,98.17 146.51,98.09 146.51,97.67 146.6,97.59 146.6,39.37 146.07,38.84
  BOTTOM w0.2: v1(153.06,34.8) 149.02,38.84 v1(144.19,38.84)
D+: length 12.3
  TOP w0.09: U10.43 135.19,127.89 135.28,127.98 135.39,127.98 135.48,128.07 135.48,128.2 134.48,129.21 127.31,129.21 126.97,129.54 126.97,130.49 127.26,130.78 U11.6
D+ CONN: length 10.9
  TOP w0.09: J13.3 116.97,130.85 120.35,130.85 120.73,130.47 123.87,130.47 124.5,131.1 125.7,131.1 U11.1
D-: length 10.4
  TOP w0.09: U10.42 135.99,127.89 135.9,127.98 135.79,127.98 135.7,128.07 135.7,128.29 134.57,129.42 127.73,129.42 127.64,129.51 U11.4
D- CONN: length 11
  TOP w0.09: J13.2 116.97,130.64 120.26,130.64 120.64,130.25 123.85,130.25 124.7,129.4 125.66,129.4 U11.3
DC_EN: length 129.8
  TOP w0.09: U10.39 138.39,128.89 138.24,129.04 v2(138.24,129.52)
  TOP w0.127: v1(147.01,97.88) 144.46,97.88 v1(143.98,97.4) ; v1(100.07,52.95) 100.07,55.96 100.03,56 U2.6
  BOTTOM w0.127: v1(147.01,97.88) 147.01,111.02 138.24,119.79 v2(138.24,129.52) ; v1(143.98,97.4) 143.98,58.83 141.76,56.61 105.12,56.61 101.46,52.95 v1(100.07,52.95)
FB: length 9.7
  TOP w0.127: U13.4 79.02,88.57 80.48,87.11 R59.2 80.48,83.41 80.51,83.38 C51.2 80.51,81.35 81.01,80.85 R51.1
FB_5V: length 162.4
  TOP w1: 98.71,121.48 100.52,119.67 100.52,114.07 101.94,112.65 v2(104.66,112.65) 105.79,111.52 L3.1 ; 98.71,121.48 L4.1 ; 98.71,121.48 98.68,121.48 94.4,125.76 94.4,132.58 91.68,135.3 ; 48.76,112.51 50.91,114.66 C32.1 50.91,123.22 50.96,123.26 C33.1 50.96,127.5 51.46,128 R36.2 51.42,129.14 R37.1 52.53,131.28 53.6,132.35 53.6,133.56 55.69,135.65 91.33,135.65 91.68,135.3 ; 48.76,112.51 D8.2 ; 48.76,112.51 49.85,112.51 50.28,112.08 D9.2 ; U15.4 U15.3 96.21,128.51 95.77,128.95 95.77,129.97 96.21,130.41 U15.1 97.21,131.29 97.53,131.6 C53.2 97.53,132.94 95.17,135.3 91.68,135.3 ; R54.1 79.91,98.92 R56.2 82.8,100.96 83.8,101.96 83.8,108.21 v2(88.24,112.65)
  POWER PLANE w1: v2(104.66,112.65) 103.73,112.65 103.72,112.65 v2(88.24,112.65) 84.21,112.65 TP1.1
FB_15V: length 102.2
  TOP w1: 95.17,113.18 93.79,114.55 v2(92.86,114.55) ; 95.17,113.18 95.17,121.53 92,124.7 92,131.5 90.9,132.6 68.3,132.6 66.41,130.71 R48.2 66.41,127.59 66.51,127.49 C47.1 66.51,123.26 66.49,123.25 C46.1 64.91,116.26 64.91,114.31 64.6,114.01 D19.2 65.84,112.51 66.27,112.08 D20.2 ; 95.17,113.18 L7.1 ; TP3.1 86.95,114.55 v2(88.05,114.55) 82.3,108.8 82.3,103.6 81.79,103.09 R57.2
  POWER PLANE w1: v2(92.86,114.55) v2(88.05,114.55)
